# EAGLE board aurdino 2 (EAGLE 9.7.0)

Size 217.63 x 122.43 mm. Coordinates in mm from the lower left corner, seen from the top.
Outline: 0,0 217.63,0 217.63,122.43 0,122.43 0,0
Copper layers (1*16): Top 0.035mm / dielectric 1.5mm / Bottom 0.035mm
Design rules "default": minimum track width 6mil, minimum drill 0.35mm, track to track 6mil, track to pad 6mil, pad to pad 6mil, via to via 6mil, smd to smd 6mil, copper to edge 40mil, drill to drill 6mil, minimum pad ring 10mil, minimum via ring 8mil, stop-mask expansion 4mil, vias tented up to drill 0mil, thermal gap 10mil

## Footprints (pad centres in the part's own frame; a part is rotated, then mirrored left to right if it is on the bottom)
WS2812-STRIP = drill 1.016 long: 1 -3.81,0; 2 -1.27,0; 3 1.27,0; 4 3.81,0
HA-06-SM065 = drill 1 pad 1.676: 1 -2.54,-2.54; 2 0,2.54; 3 2.54,-2.54
ARDUINO-UNO-R3-SHIELD = drill 1.016 pad 1.88: 3.3V 24.13,-2.54; 5V 24.13,0; A0 24.13,12.7; A1 24.13,15.24; A2 24.13,17.78; A3 24.13,20.32; A4 24.13,22.86; A5 24.13,25.4; AREF -24.13,-13.97; D2 -24.13,20.32; D3 -24.13,17.78; D4 -24.13,15.24; D5 -24.13,12.7; D6 -24.13,10.16; D7 -24.13,7.62; D8 -24.13,3.81; D9 -24.13,1.27; D10 -24.13,-1.27; D11 -24.13,-3.81; D12 -24.13,-6.35; D13 -24.13,-8.89; GND@0 24.13,2.54; GND@1 24.13,5.08; GND@2 -24.13,-11.43; IOREF 24.13,-7.62; NC 24.13,-10.16; RES 24.13,-5.08; RX -24.13,25.4; SCL -24.13,-19.05; SDA -24.13,-16.51; TX -24.13,22.86; VIN 24.13,7.62

## Placement (x,y rotation side)
LED4  WS2812B_STRIP  [WS2812-STRIP]  178.33,115.92 0 top
LED5  WS2812B_STRIP  [WS2812-STRIP]  150.25,115.95 0 top
LED6  WS2812B_STRIP  [WS2812-STRIP]  209.88,116.16 0 top
LED7  WS2812B_STRIP  [WS2812-STRIP]  45.05,112.78 0 top
LED8  WS2812B_STRIP  [WS2812-STRIP]  16.98,112.81 0 top
LED9  WS2812B_STRIP  [WS2812-STRIP]  76.6,113.02 0 top
RPOT1  250k  [HA-06-SM065]  171.24,10.18 180 top
RPOT2  250k  [HA-06-SM065]  189.02,10.18 180 top
RPOT4  250k  [HA-06-SM065]  206.8,10.18 180 top
RPOT5  250k  [HA-06-SM065]  37.96,7.05 180 top
RPOT6  250k  [HA-06-SM065]  55.74,7.05 180 top
RPOT7  250k  [HA-06-SM065]  73.52,7.05 180 top
U1  ARDUINO-UNO-R3-SHIELD  [ARDUINO-UNO-R3-SHIELD]  181.16,76.26 270 top
U3  ARDUINO-UNO-R3-SHIELD  [ARDUINO-UNO-R3-SHIELD]  47.88,73.13 270 top

## Library data of the parts
LED4-LED9 RPOT1 RPOT2 RPOT4-RPOT7 U1 U3 = Tinkercad

## Nets
U1_5V: LED4.2 LED5.2 LED6.2 RPOT1.3 RPOT2.3 RPOT4.3 U1.5V
U1_A1: RPOT1.2 U1.A1
U1_A2: RPOT2.2 U1.A2
U1_A3: RPOT4.2 U1.A3
U1_D5: LED6.1 U1.D5
U1_D6: LED4.1 U1.D6
U1_D7: LED5.1 U1.D7
U1_GND: LED4.3 LED5.3 LED6.3 RPOT1.1 RPOT2.1 RPOT4.1 U1.GND@0 U1.GND@1 U1.GND@2
U3_5V: LED7.2 LED8.2 LED9.2 RPOT5.3 RPOT6.3 RPOT7.3 U3.5V
U3_A1: RPOT5.2 U3.A1
U3_A2: RPOT6.2 U3.A2
U3_A3: RPOT7.2 U3.A3
U3_D5: LED9.1 U3.D5
U3_D6: LED7.1 U3.D6
U3_D7: LED8.1 U3.D7
U3_GND: LED7.3 LED8.3 LED9.3 RPOT5.1 RPOT6.1 RPOT7.1 U3.GND@0 U3.GND@1 U3.GND@2

## Tracks (layer width: path | path; a pad name or v marks a point on that pad's centre or on a via)
U1_5V  (6 unrouted)
U1_A1  (1 unrouted)
U1_A2  (1 unrouted)
U1_A3  (1 unrouted)
U1_D5  (1 unrouted)
U1_D6  (1 unrouted)
U1_D7  (1 unrouted)
U1_GND  (8 unrouted)
U3_5V  (6 unrouted)
U3_A1  (1 unrouted)
U3_A2  (1 unrouted)
U3_A3  (1 unrouted)
U3_D5  (1 unrouted)
U3_D6  (1 unrouted)
U3_D7  (1 unrouted)
U3_GND  (8 unrouted)